# EAGLE board avr_g1000l_24 (EAGLE 9.4.0)
040219: OIL: Photosensor, Header, LDO find smallest, 50mA sufficient LDOselection: SC70=SOT323: too few models available TPS715 xx GND xx in out LD5901 in GND xx xx out SOT23-3: too few models available MCP1700 GND Vin Vout SOT23-5: widely available ST715 xx GND xx Vout Vin LK112 xx GND xx Vout Vout LP2981 Vin GND xx xx Vout LP2985 Vin GND xx xx Vout LD2981 Vin GND xx xx Vout <---selected model LD39015 Vin GND xx xx Vout LD3985 Vin GND xx xx Vout LDS3985 Vin GND xx xx Vout TPS715 Vin GND xx xx Vout 05: final routing corrected radii outline holes checked ok 06: replaced E37 footprint 07: added C8, C6 AREF to VCC 08: more distance from tact pads tried fpc conn, too wide 09 header4x1.27 pads more slim visual alignment check with frame drills checked ok intersection ckd 10 replaced 22p, 100n to 0402 visual component placement check vector font ckd components placement v20 enlarge Alps EC GND pads DRC ok v21 testpoints, names cleanup DRC ok v22 new tact switches, drills 2mm DRC ok v23 holes for testpoints DRC v24 Testpins d 1mm, pitch 1.27 DRC ok
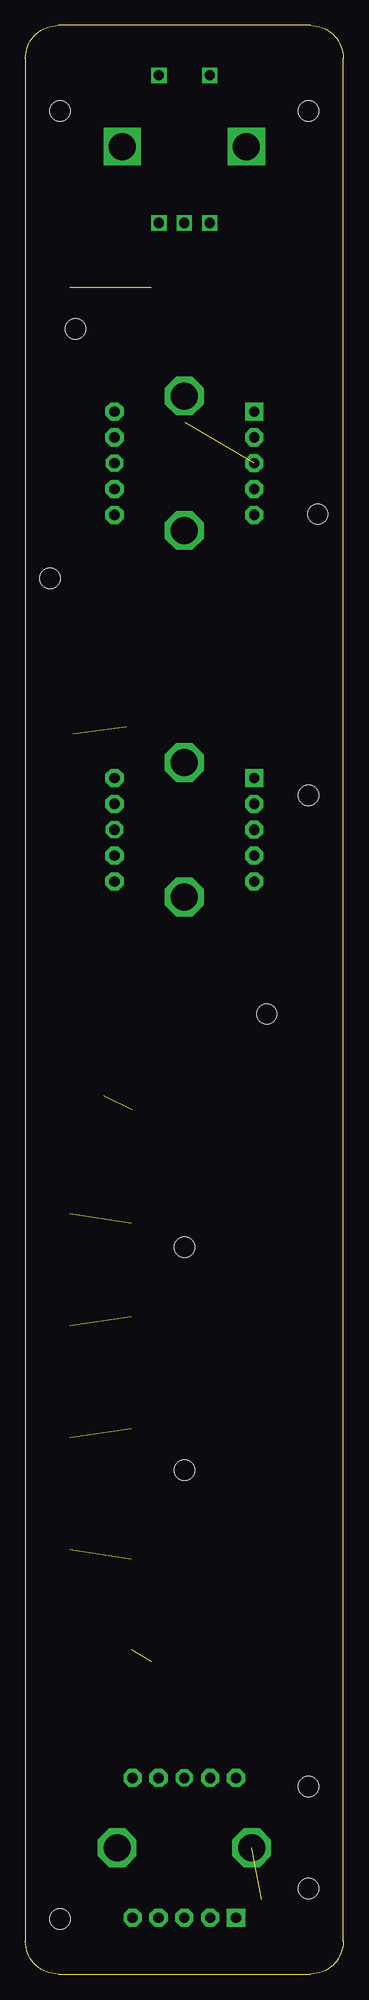
[diagram p0: board, top side]
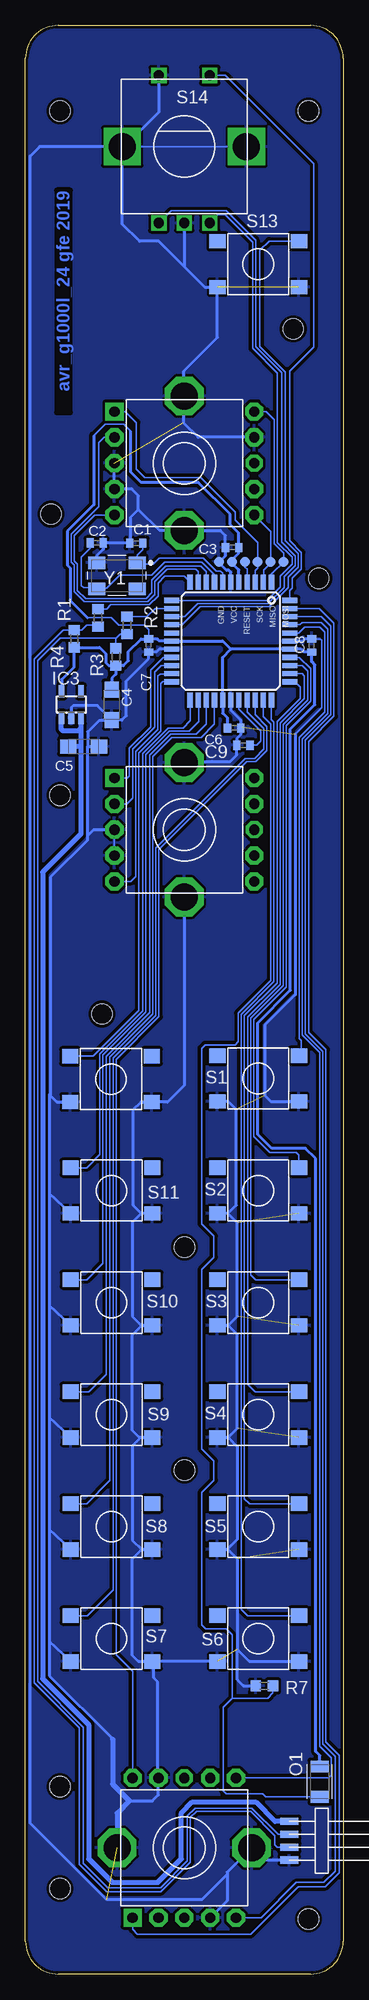
[diagram p1: board, bottom side, seen from below]

Size 31.2 x 191.4 mm. Coordinates in mm from the lower left corner, seen from the top.
Outline: 3.2,0 28,0 arc90 31.2,3.2 31.2,188.2 arc90 28,191.4 3.2,191.4 arc90 0,188.2 0,3.2 arc90 3.2,0
Copper layers (1*16): Top 0.035mm / dielectric 1.5mm / Bottom 0.035mm
Design rules "default *": minimum track width 6mil, minimum drill 0.35mm, track to track 6mil, track to pad 6mil, pad to pad 6mil, via to via 6mil, smd to smd 6mil, copper to edge 12mil, drill to drill 6mil, minimum pad ring 10mil, minimum via ring 8mil, stop-mask expansion 4mil, vias tented up to drill 0mil, thermal gap 10mil
Net classes: 0 default: width 0.15 mm, clearance 0.15 mm; 1 GND: width 0.3 mm, clearance 0.15 mm
Holes 2 mm at 3.4,183 27.8,183 4.9,161.6 28.7,143.4 2.4,137.1 27.8,115.8 23.7,94.3 15.6,71.4 15.6,49.5 27.8,18.4 27.8,8.4 3.4,5.4

## Footprints (pad centres in the part's own frame; a part is rotated, then mirrored left to right if it is on the bottom)
C0402 = smd 0.7 x 0.9: 1 -0.65,0; 2 0.65,0
SMC_A = smd 1.6 x 1.4: + -1.5,0; - 1.5,0
TP10R = smd 1 x 1: TP 0,0
TQFP44 = smd 1.5 x 0.5: 1 -5.8,4; 2 -5.8,3.2; 3 -5.8,2.4; 4 -5.8,1.6; 5 -5.8,0.8; 6 -5.8,0; 7 -5.8,-0.8; 8 -5.8,-1.6; 9 -5.8,-2.4; 10 -5.8,-3.2; 11 -5.8,-4; 23 5.8,-4; 24 5.8,-3.2; 25 5.8,-2.4; 26 5.8,-1.6; 27 5.8,-0.8; 28 5.8,0; 29 5.8,0.8; 30 5.8,1.6; 31 5.8,2.4; 32 5.8,3.2; 33 5.8,4 | smd 0.5 x 1.5: 12 -4,-5.8; 13 -3.2,-5.8; 14 -2.4,-5.8; 15 -1.6,-5.8; 16 -0.8,-5.8; 17 0,-5.8; 18 0.8,-5.8; 19 1.6,-5.8; 20 2.4,-5.8; 21 3.2,-5.8; 22 4,-5.8; 34 4,5.8; 35 3.2,5.8; 36 2.4,5.8; 37 1.6,5.8; 38 0.8,5.8; 39 0,5.8; 40 -0.8,5.8; 41 -1.6,5.8; 42 -2.4,5.8; 43 -3.2,5.8; 44 -4,5.8
SOT23-5 = smd 0.55 x 1.2: 1 -0.95,-1.3; 2 0,-1.3; 3 0.95,-1.3; 4 0.95,1.3; 5 -0.95,1.3
RESC3216X110 = smd 1.165 x 1.815: 1 -1.475,0; 2 1.475,0
R0603 = smd 1 x 1.1: 1 -0.85,0; 2 0.85,0
B3FS1000 = smd 1.6 x 1.4: 1 -4,2.25; 2 4,2.25; 3 -4,-2.25; 4 4,-2.25
ALPS_EC12E_SW = drill 1 square: A -2.5,-7.5; B 2.5,-7.5; C 0,-7.5; D -2.5,7; E 2.5,7 | drill 2.65 square: GND1 -6.1,0; GND2 6.1,0
ELMA_E37 = drill 1 pad 1.778 square: P1 -6.858,5.08 | drill 1 pad 1.778 octagon: P2 -6.858,2.54; P3 -6.858,0; P4 -6.858,-2.54; P5 -6.858,-5.08; P6 6.858,-5.08; P7 6.858,-2.54; P9 6.858,2.54; P10 6.858,5.08 | drill 1 pad 1.676 octagon: P8 6.858,0 | drill 2.642 pad 3.81 octagon: P11 0,6.604; P12 0,-6.604
HEADER4X1.27 = smd 1.803 x 0.711: P1 0,0; P2 0,1.27; P3 0,2.54; P4 0,3.81
OSCCC500X320X100 = smd 1.662 x 1.262: 1 -1.975,-1.275; 2 1.975,-1.275; 3 1.975,1.275; 4 -1.975,1.275

## Placement (x,y rotation side)
C1  [C0402]  20.32,140.55 180 bottom
C2  [C0402]  24.2,140.58 0 bottom
C3  [C0402]  10.91,140.12 180 bottom
C4  [SMC_A]  22.72,124.67 270 bottom
C5  [SMC_A]  25.49,120.58 0 bottom
C6  [C0402]  10.71,122.39 0 bottom
C7  [C0402]  19.1,130.5 270 bottom
C8  [C0402]  3.1,130.5 90 bottom
C9  [C0402]  9.8,120.7 180 bottom
GND  TPTP10R  [TP10R]  12.2,138.7 0 bottom
IC1  MEGA16-A  [TQFP44]  11.04,130.93 270 bottom
IC3  LP2981M5  [SOT23-5]  26.7,124.7 0 bottom
MISO  TPTP10R  [TP10R]  7.12,138.7 0 bottom
MOSI  TPTP10R  [TP10R]  5.85,138.7 0 bottom
O1  KPS-3227KPS-3227  [RESC3216X110]  2.3,18.9 270 bottom
R1  [R0603]  24.08,133.21 90 bottom
R2  [R0603]  21.22,132.48 270 bottom
R3  1K5  [R0603]  22.32,129.37 270 bottom
R4  1M5  [R0603]  26.42,131.16 270 bottom
R7  [R0603]  7.75,28.32 0 bottom
RESET  TPTP10R  [TP10R]  9.66,138.7 0 bottom
S1  B3FS1000  [B3FS1000]  8.35,87.95 0 bottom
S2  B3FS1000  [B3FS1000]  8.35,76.95 0 bottom
S3  B3FS1000  [B3FS1000]  8.35,65.95 0 bottom
S4  B3FS1000  [B3FS1000]  8.35,54.95 0 bottom
S5  B3FS1000  [B3FS1000]  8.35,43.95 0 bottom
S6  B3FS1000  [B3FS1000]  8.35,32.95 0 bottom
S7  B3FS1000  [B3FS1000]  22.75,32.95 0 bottom
S8  B3FS1000  [B3FS1000]  22.75,43.95 0 bottom
S9  B3FS1000  [B3FS1000]  22.75,54.95 0 bottom
S10  B3FS1000  [B3FS1000]  22.75,65.95 0 bottom
S11  B3FS1000  [B3FS1000]  22.75,76.95 0 bottom
S12  B3FS1000  [B3FS1000]  22.8,87.9 0 bottom
S13  B3FS1000  [B3FS1000]  8.35,167.95 0 bottom
S14  ALPS_EC12ALPS_EC12  [ALPS_EC12E_SW]  15.6,179.5 0 bottom
S16  ELMA_E37  [ELMA_E37]  15.6,148.4 0 bottom
S17  ELMA_E37  [ELMA_E37]  15.6,112.4 0 bottom
S18  ELMA_E37  [ELMA_E37]  15.6,12.4 90 bottom
SCK  TPTP10R  [TP10R]  8.39,138.7 0 bottom
U$4  HEADER4X1.27  [HEADER4X1.27]  5.3,15 180 bottom
VCC  TPTP10R  [TP10R]  10.93,138.7 0 bottom
Y1  MJ-CRYSTALMJ  [OSCCC500X320X100]  22.21,137.34 180 bottom

## Library data of the parts
C1-C9 = rcl; SPICEPREFIX: C
GND MISO MOSI RESET SCK VCC = testpad
IC1 = atmel; MPN: ATMEGA16-16AU; OC_FARNELL: 9171134; OC_NEWARK: 96K6515
IC3 = v-reg-3
O1 = kps-3227
R1-R4 R7 = rcl; SPICEPREFIX: R
S1 = omron b3fs1000; SPICEPREFIX: S
S2-S13 = omron b3fs1000
S14 = alps_ec12
S16-S18 = elma e37
U$4 = header4x1.27
Y1 = euroquartz

## Nets
D+: R2.2 R3.1 U$4.P2
D-: R1.1 R4.1 U$4.P3
GND [GND]: C1.2 C2.2 C3.2 C4.- C5.- C6.2 C7.2 C8.2 C9.2 GND.TP IC1.6 IC1.18 IC1.28 IC1.39 IC3.2 R7.1 S1.3 S1.4 S2.3 S2.4 S3.3 S3.4 S4.3 S4.4 S5.3 S5.4 S6.3 S6.4 S7.3 S7.4 S8.3 S8.4 S9.3 S9.4 S10.3 S10.4 S11.3 S11.4 S12.3 S12.4 S13.3 S13.4 S14.C S14.D S14.GND1 S14.GND2 S16.P3 S16.P4 S16.P9 S16.P11 S16.P12 S17.P3 S17.P4 S17.P11 S17.P12 S18.P4 S18.P9 S18.P11 S18.P12 U$4.P4 Y1.2
PA0: IC1.37 S2.2
PA1: IC1.36 S3.2
PA2: IC1.35 S4.2
PA3: IC1.34 S5.2
PA4: IC1.33 S6.2
PA5: IC1.32 O1.2 R7.2
PA6: IC1.31 S18.P10
PA7: IC1.30 S7.1
PB0: IC1.40 S1.2
PB1: IC1.41 S18.P6
PB2: IC1.42 S18.P5
PB3: IC1.43 S18.P1
PB4: IC1.44 S14.E
PB5: IC1.3 S16.P1 SCK.TP
PB6: IC1.1 MOSI.TP S16.P10
PB7: IC1.2 MISO.TP S16.P6
PC0: IC1.19 S17.P1
PC1: IC1.20 S17.P2
PC2: IC1.21 S17.P5
PC3: IC1.22 S12.1
PC4: IC1.23 S11.1
PC5: IC1.24 S10.1
PC6: IC1.25 S9.1
PC7: IC1.26 S8.1
PD0: IC1.9 S16.P5
PD1: IC1.10 S16.P2
PD2: IC1.13 R2.1
PD3: IC1.12 S14.B
PD4: IC1.11 R1.2
PD5: IC1.14 S14.A
PD6: IC1.15 S13.2
RESET: IC1.4 RESET.TP
V5V: C5.+ IC3.1 IC3.3 U$4.P1
VCC: C3.1 C4.+ C6.1 C7.1 C8.1 IC1.5 IC1.17 IC1.27 IC1.38 IC3.5 O1.1 R3.2 R4.2 VCC.TP
VREF: C9.1 IC1.29
XTAL1: C2.1 IC1.8 Y1.3
XTAL2: C1.1 IC1.7 Y1.1

## Tracks (layer width: path | path; a pad name or v marks a point on that pad's centre or on a via)
D+
  Bottom 0.152: R3.1 22.32,131.18 22.3,131.2 | R2.2 21.87,131.63 22.3,131.2 | 22.3,131.2 27.8,131.2 30.01,128.99 30.01,28.74 25.5,24.23 25.5,10.87 23.13,8.5 17.94,8.5 15.31,11.13 15.31,15.53 14.53,16.3 8.97,16.3 6.4,13.73 U$4.P2
D-
  Bottom 0.152: R1.1 24.22,132.5 25.2,132.5 25.69,132.01 R4.1 27.5,132 30.31,129.19 30.31,28.61 25.91,24.2 25.91,10.77 23.23,8.1 17.91,8.1 15,11 15,15.4 14.4,16 9.1,16 6.7,13.6 6.7,12.7 6.46,12.46 U$4.P3
GND  (10 unrouted)
  Bottom 0.15: 2.25,131.15 C8.2
  Bottom 0.152: S14.GND2 S14.GND1 | 4.7,121.8 2.12,124.38 2.12,131.03 2.25,131.15 | 23.73,140.58 C2.2 23.4,140.58 23.37,140.55 | Y1.2 24.19,138.72 | S17.P4 22.46,112.3 S17.P3 | S17.P11 15.5,119.1
  Bottom 0.3: 22.64,23.09 28.85,29.3 28.85,32.67 | 28.85,86.4 28.85,76.67 | 28.85,76.67 28.85,65.67 | 28.85,65.67 28.85,54.67 | 28.85,54.67 28.85,43.67 | 28.85,43.67 28.85,32.67 | C3.2 11.56,141.3 12.06,141.8 | C8.2 3.75,131.15 4,130.9 5.21,130.9 IC1.39 | 11.04,124.14 10.06,123.16 C6.2 | IC1.18 18.07,130.13 18.35,129.85 C7.2 19.1,129.22 21.3,127.03 | 20.89,142 20.89,140.62 C1.2 | C2.2 23.55,139.95 24.19,139.31 Y1.2 | S16.P9 14.24,150.94 | 23.92,123.17 22.5,123.17 | S17.P12 15.6,87.3 | 18.14,17.6 18.14,19.1 | 18.14,19.1 S18.P9 | 11.4,7.2 S18.P4 | 9.8,28.32 R7.1 | 18.6,30.72 18.49,30.72 | 18.14,19.1 18.21,19.17 18.21,28.69 18.6,29.08 18.6,30.72 | S7.3 28.85,32.67 | S8.3 28.85,43.67 | S9.3 28.85,54.67 | S10.3 28.85,65.67 | S11.3 28.85,76.67 | 24.5,112.4 22.56,112.4 22.46,112.3 | 25.09,120.6 25.07,120.58 C5.- | S18.P12 11.4,10 11.4,9.8 | 15.7,157.4 15.7,155.1 S16.P11 15.7,154.9 15.7,152.4 | 11.6,140.08 C3.2 | S7.4 18.6,30.72 | S13.3 12.69,165.9 | 9.22,30.72 9.2,30.7 S6.4 | 7.12,85.72 7.1,85.7 S1.4 | 17.23,85.67 17.25,85.65 18.6,85.65 | 18.6,85.65 S12.4 | 19.83,85.67 18.62,85.67 18.6,85.65 | 28.12,85.67 28.1,85.65 S12.3 | 13.8,165.9 13.6,165.7 S13.3 | 12.5,160.6 12.35,160.75 S13.3 | 20.12,30.72 20.1,30.7 S7.4 | 20.02,52.72 20,52.7 S9.4 | S6.3 S7.4 | IC1.6 11.04,137.7 11.24,137.9 11.46,137.9 12.2,138.64 GND.TP 12.16,138.7 11.56,139.3 C3.2
  Bottom 0.305: 15.7,152.4 14.24,150.94 | 4.7,121.8 4.7,96.2 7.7,93.2 7.7,86.3 7.12,85.72 | 11.4,7.2 11.4,9.8 13.88,7.32 23.23,7.32 30.73,14.82 30.73,178.57 29.8,179.5 S14.GND1 21.7,179.3 | S14.C 15.6,167.7 | 15.6,167.7 13.8,165.9 | 15.7,157.4 12.5,160.6 | 19.83,85.67 20.6,84.9 20.6,75.5 19.82,74.72 | S11.4 19.82,74.72 | 19.82,74.72 20.7,73.83 20.7,64.6 19.82,63.72 19.8,63.72 | 19.8,63.72 S10.4 | 19.8,63.72 19.8,63.7 20.7,62.8 20.7,53.4 20.02,52.72 19.88,52.72 20.7,51.9 20.7,42.6 19.8,41.7 | 19.8,41.7 S8.4 18.62,41.7 | 19.8,41.7 20.7,40.8 20.7,31.3 20.12,30.72 | 10.4,31.9 10.4,40.8 11.32,41.72 11.42,41.72 | S5.3 11.42,41.72 | 11.42,41.72 11.4,41.7 10.4,42.7 10.4,51.8 11.3,52.7 | 12.49,52.7 S4.3 11.3,52.7 | 11.3,52.7 10.4,53.6 10.4,62.83 11.28,63.72 | 11.32,74.72 10.4,73.8 10.4,64.6 11.28,63.72 | 11.32,74.72 10.5,75.53 10.5,84.9 11.3,85.7 S1.3 12.49,85.7 | S3.3 11.28,63.72 | 11.32,74.72 S2.3 | S1.4 | 10.4,31.9 10.4,28.92 9.8,28.32 | 15.6,87.3 17.23,85.67 | 10.4,31.9 9.22,30.72 | 18.3,30.72 18.49,30.72 18.6,30.6 | 15.6,167.7 18.1,170.2 20,170.2 21.7,171.9 21.7,179.3 | S14.D 18.1,182.9 21.7,179.3 | 25.09,111.81 24.5,112.4 | 28.75,86.3 28.75,107.75 25.09,111.41 25.09,111.81 | 21,17 18.74,17 18.14,17.6 | 28.75,86.3 28.12,85.67 | 28.75,86.3 28.85,86.4 | 25.09,111.81 25.09,120.6 25.09,122 23.92,123.17 | S16.P3 S16.P4 20.76,145.86 20.1,145.2 20.1,143.86 | C1.2 23.37,140.55 | 15.5,119.1 12.9,119.1 | 12.9,119.1 | IC3.2 26.7,124.4 26.5,124.6 24.15,124.6 C4.- 22.5,123.17 21.72,123.17 21.3,123.59 21.3,127.03 | 11,136.77 IC1.6 | 12.06,141.8 S16.P12 18.04,141.8 20.1,143.86 | 20.1,143.86 20.89,143.07 20.89,142 20.89,141.85 | U$4.P4 7.79,11.19 S18.P12
  Bottom 0.305: 12.9,119.1 11.1,119.1 10.45,119.75 C9.2 10.45,121.35 10.06,121.74 C6.2 9.9,122.46 | IC1.28 11.04,124.14
  Bottom 0.5: 21,17 22.64,18.64 22.64,23.09
  Bottom 0.508: 21,17 22.2,15.8 S18.P11
  pour Bottom (isolate 0.305): -1,192.4 30.7,192.4 32.7,190.4 32.7,0.9 30.2,-1.6 1.5,-1.6 -1.4,1.3 -1.4,192
PA0
  Bottom 0.152: IC1.37 4.3,129.33 3.19,128.22 3.19,125.02 5.58,122.63 5.58,96.96 8.78,93.76 8.78,82.25 7.23,80.7 4.6,80.7 4.35,80.45 S2.2
PA1
  Bottom 0.152: IC1.36 4.03,128.53 3.5,128 3.5,127.63 3.5,125.14 5.89,122.75 5.89,97.09 9.09,93.89 9.09,68.69 8.62,68.22 8.6,68.2 S3.2
PA2
  Bottom 0.152: IC1.35 4.03,127.73 3.8,127.5 3.8,125.27 6.19,122.88 6.19,97.22 9.39,94.02 9.39,57.9 8.71,57.22 8.69,57.2 S4.2
PA3
  Bottom 0.152: IC1.34 4.74,126.93 4.2,126.39 4.2,125.3 6.5,123.01 6.5,97.34 9.7,94.14 9.7,46.7 9.22,46.22 9.2,46.2 S5.2
PA4
  Bottom 0.152: IC1.33 7.04,123.23 6.8,122.99 6.8,97.47 10,94.27 10,35.8 9.42,35.22 9.4,35.2 S6.2
PA5
  Bottom 0.152: IC1.32 7.84,123.5 7.12,122.78 7.12,97.58 10.31,94.4 10.31,91.59 10.62,91.28 13.54,91.28 13.9,90.92 13.9,73.7 12.7,72.5 12.7,70.4 13.9,69.2 13.9,51.6 12.7,50.4 12.7,48.5 13.9,47.3 13.9,34.3 13.5,33.9 11.5,33.9 10.9,33.3 10.9,27.1 | O1.2 7.62,17.42 7.9,17.7 11.5,17.7 11.8,18 11.8,26.2 10.9,27.1 | R7.2 6.9,27.6 7.4,27.1 10.9,27.1
PA6
  Bottom 0.152: S18.P10 20.68,29.74 22.29,31.35 22.29,89.85 18.09,94.05 18.09,110.48 9.47,119.09 8.57,119.09 7.49,120.18 7.49,122.55 8.64,123.7 IC1.31
PA7
  Bottom 0.152: IC1.30 9.44,123.97 7.79,122.33 7.79,120.97 7.8,120.97 7.8,120.3 8.7,119.4 9.6,119.4 18.4,110.61 18.4,94.17 22.59,89.97 22.59,37.73 25.12,35.2 S7.1
PB0
  Bottom 0.152: IC1.40 4.34,131.73 3.76,132.31 2.31,132.31 1.82,131.82 1.82,123.94 4.32,121.44 4.32,91.92 4.1,91.7 4.1,90.32 S1.2
PB1
  Bottom 0.152: IC1.41 4.24,132.53 4.04,132.73 2.13,132.73 1.51,132.11 1.51,123.82 4.01,121.32 4.01,92.21 2.3,90.5 2.3,22.39 1.16,21.25 1.16,19.5 1.4,19.26 S18.P6
PB2
  Bottom 0.152: IC1.42 2.13,133.33 1.21,132.41 1.21,123.69 3.7,121.2 3.7,92.33 2,90.63 2,22.59 0.8,21.4 0.8,10.1 1.9,9 4.6,9 8.06,5.54 S18.P5
PB3
  Bottom 0.152: S18.P1 20.68,4.38 20.2,3.9 9.1,3.9 4.41,8.6 1.77,8.6 0.4,9.97 0.4,21.5 1.69,22.79 1.69,90.79 3.39,92.5 3.39,121.07 0.91,123.56 0.91,132.71 2.33,134.13 IC1.43
PB4
  Bottom 0.152: S14.E 11.6,186.5 2.9,177.8 2.9,159.8 5.24,157.46 5.24,140.78 4.11,139.64 4.11,138 4.99,137.11 4.99,136.15 5.24,135.9 IC1.44
PB5
  Bottom 0.152: S16.P1 21.38,153.48 20.3,152.4 20.3,147.8 19.5,147 14,147 10.6,143.6 10.6,142.8 8.39,140.59 SCK.TP 8.39,138.1 8.64,137.85 IC1.3
PB6
  Bottom 0.152: S16.P10 7.54,153.48 6.77,152.7 6.77,140.48 5.85,139.56 MOSI.TP 5.76,138.79 5.75,138.79 7.04,137.5 IC1.1
PB7
  Bottom 0.152: IC1.2 7.8,136.77 7.8,137.92 7.12,138.6 MISO.TP 7.12,141.7 S16.P6
PC0
  Bottom 0.152: IC1.19 16.86,129.31 17.69,129.31 18.91,128.08 18.91,122.5 21.01,120.4 21.01,117.7 21.22,117.48 S17.P1
PC1
  Bottom 0.152: IC1.20 16.86,128.51 17.88,128.51 18.51,127.88 18.51,122.46 20.67,120.3 20.67,115.5 21.23,114.94 S17.P2
PC2
  Bottom 0.152: IC1.21 16.86,127.71 17.98,127.71 18.2,127.49 18.2,122.24 20.37,120.08 20.37,107.8 20.85,107.32 S17.P5
PC3
  Bottom 0.152: IC1.22 17.74,126.93 17.9,126.77 17.9,122.11 20.06,119.95 20.06,94.66 24.52,90.2 26.92,90.2 S12.1
PC4
  Bottom 0.152: IC1.23 15,125.09 15,123.1 15.72,122.38 17.2,122.38 19.7,119.88 19.7,94.6 23.9,90.39 23.9,80.5 25.2,79.2 26.89,79.2 S11.1
PC5
  Bottom 0.152: IC1.24 14.2,125.09 14.2,123 15.12,122.08 17.07,122.08 19.38,119.77 19.38,94.48 23.59,90.27 23.59,69.8 25.2,68.2 S10.1
PC6
  Bottom 0.152: IC1.25 13.44,122.76 14.43,121.77 16.95,121.77 19.01,119.71 19.01,94.43 23.29,90.15 23.29,58.9 24.99,57.2 S9.1
PC7
  Bottom 0.152: IC1.26 12.64,122.76 13.93,121.47 16.82,121.47 18.7,119.59 18.7,94.3 22.9,90.1 22.9,48.5 25.2,46.2 S8.1
PD0
  Bottom 0.152: S16.P5 24.38,143.32 26.4,141.3 26.4,138.8 26.1,138.5 26.1,135.9 25.3,135.1 19.34,135.1 18.8,135.7 18.8,136.9 17.4,138.3 14,138.3 13.44,137.74 IC1.9
PD1
  Bottom 0.152: S16.P2 23.46,150.94 24,150.4 24,144.13 26.7,141.43 26.7,138.67 26.41,138.37 26.41,135.77 25.43,134.8 19.17,134.8 18.49,135.48 18.49,136.78 17.27,138 14.49,138 14.24,137.74 IC1.10
PD2
  Bottom 0.152: R2.1 19.27,133.33 18.47,134.13 IC1.13
PD3
  Bottom 0.152: S14.B 12.3,172.8 11.6,172.8 8.9,170.1 8.9,159.7 6.46,157.26 6.46,140.61 5.02,139.16 5.02,138.48 6.2,137.3 6.2,136.23 7.5,134.93 IC1.12
PD4
  Bottom 0.152: R1.2 23.24,134.06 22.81,134.49 19.05,134.49 18.18,135.35 18.18,136.62 17.5,137.3 15.61,137.3 IC1.11
PD5
  Bottom 0.152: S14.A 16.9,173.2 11.5,173.2 8.6,170.3 8.6,159.83 6.06,157.29 6.06,140.63 4.71,139.29 4.71,138.36 5.8,137.27 5.8,136.2 7.4,134.6 14.3,134.6 15.57,133.33 IC1.14
PD6
  Bottom 0.152: IC1.15 15.82,132.53 14.05,134.3 7.27,134.3 5.39,136.17 5.39,137.2 4.41,138.19 4.41,139.52 5.69,140.8 5.69,157.35 8.2,159.86 8.2,169.31 7.28,170.22 4.37,170.22 S13.2
RESET
  Bottom 0.152: RESET.TP 9.66,138.2 9.44,137.98 IC1.4
V5V
  Bottom 0.5: IC3.3 25.75,122.35 | 25.75,122.35 26,122.1 27.5,122.1 27.7,122.3 27.7,123.35 IC3.1 | U$4.P1 6.7,15 8.6,16.9 14.8,16.9 15.9,15.8 15.9,11.3 18.2,9 22.7,9 25,11.3 25,24.5 29.51,29.01 29.51,108.22 25.75,111.98 25.75,120.6 | 25.75,122.35 25.75,120.6 | C5.+ 26.97,120.6 25.75,120.6
VCC
  Bottom 0.152: 11.85,130.93 11.84,130.94 | 20.86,151.53 21.56,152.23 23.35,152.23 24.48,151.11 | 25.12,133.23 22.8,133.23 22.06,132.5 19.54,132.5 19.1,132.06 C7.1 | 10.24,137.91 10.29,137.96
  Bottom 0.3: O1.1 2.3,21.47 2.7,21.88 2.7,80.1 3.7,81.1 7,81.1 8.38,82.48 8.38,93.44 5.18,96.64 5.18,122.3 2.79,124.69 2.79,128.59 3.1,128.9 C8.1 3.85,129.85 4.13,130.13 IC1.38 | 11.09,142.38 10.26,141.55 C3.1 10.26,139.57 10.93,138.9 VCC.TP 10.93,138.6 10.29,137.96 | 11.84,123.84 11.36,123.36 C6.1 | IC1.17 18.03,130.93 18.25,131.15 C7.1 19.85,131.15 21.1,129.9 | IC1.5 10.24,137.91
  Bottom 0.305: IC1.17 11.85,130.93 | 11.03,130.13 11.84,130.94 | IC1.38 11.03,130.13 | 11.09,142.38 11.09,143.4 14.21,146.52 19.83,146.52 20.86,147.55 20.86,151.53 | 11.03,130.13 11.84,129.32 IC1.27 11.84,123.84 | 24.48,151.11 24.48,144.32 27.09,141.71 27.09,138.39 26.81,138.11 26.81,134.92 25.12,133.23 | R3.2 22.32,127.68 22.72,127.28 C4.+ | IC3.5 27.65,127.15 26.42,128.38 R4.2 23.91,130.31 23.3,129.7 23.3,128.8 23.02,128.52 R3.2 | 21.1,129.9 21.1,129 21.58,128.52 R3.2
VREF
  Bottom 0.152: IC1.29 10.24,124.24 8.1,122.1 8.1,121.1 8.5,120.7 C9.1
XTAL1
  Bottom 0.152: IC1.8 12.64,137.44 13.9,138.7 17.5,138.7 18.8,137.4 21.95,137.4 23.21,136.14 24.11,136.14 Y1.3 24.1,136.23 24.13,136.2 25.5,136.2 25.7,136.4 25.7,139.2 24.85,140.05 C2.1
XTAL2
  Bottom 0.152: C1.1 19.67,139.93 20.23,139.37 Y1.1 20.11,138.49 18.66,138.49 18.06,139.09 13.74,139.09 12.47,137.82 12.06,137.82 11.84,137.6 IC1.7

## Text on the board
Bottom: avr_g1000l_24 gfe 2019